# EAGLE board FiberLED (EAGLE 9.0.1)
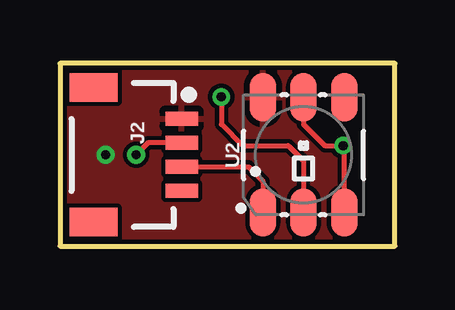
[diagram p0: board, top side]
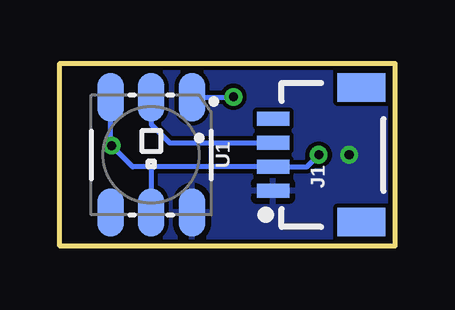
[diagram p1: board, bottom side, seen from below]

Size 13.97 x 7.62 mm. Coordinates in mm from the lower left corner, seen from the top.
Outline: 0,0 13.97,0 13.97,7.62 0,7.62 0,0
Copper layers (1*16): Top 0.035mm / dielectric 1.5mm / Bottom 0.035mm
Design rules "SparkFun-2-layer-TIGHT": minimum track width 7mil, minimum drill 15mil, track to track 7mil, track to pad 7mil, pad to pad 7mil, via to via 7mil, smd to smd 7mil, copper to edge 7mil, drill to drill 7mil, minimum pad ring 7mil, minimum via ring 7mil, stop-mask expansion 4mil, vias tented up to drill 25mil, thermal gap 10mil

## Footprints (pad centres in the part's own frame; a part is rotated, then mirrored left to right if it is on the bottom)
1X04_1MM_RA = smd 0.6 x 1.35: 1 -1.5,0; 2 -0.5,0; 3 0.5,0; 4 1.5,0 | smd 1.2 x 2: NC1 2.8,-3.675; NC2 -2.8,-3.675
LED-TRICOLOR-5050-IC = smd 2 x 1.1: 1 -2.4,1.7; 2 -2.4,0; 3 -2.4,-1.7; 4 2.4,-1.7; 5 2.4,0; 6 2.4,1.7

## Placement (x,y rotation side)
FRAME1  FRAME-LETTER  [CREATIVE_COMMONS]  -80.01,1.27 0 top  (outside the outline)
J1  [1X04_1MM_RA]  5.08,3.81 90 bottom
J2  [1X04_1MM_RA]  5.08,3.81 270 top
U1  WS2812  [LED-TRICOLOR-5050-IC]  10.16,3.81 270 bottom
U2  WS2812  [LED-TRICOLOR-5050-IC]  10.16,3.81 90 top

## Library data of the parts
FRAME1 = SparkFun-Aesthetics
J1 J2 = SparkFun-Connectors; PROD_ID: CONN-13694
U1 U2 = SparkFun-LED; PROD_ID: DIO-11598

## Nets
5V: J1.2 J2.2 U1.3 U1.5 U2.3 U2.5
GND: J1.1 J2.1 U1.6 U2.6
N$1: J1.3 U1.2
N$3: J2.3 U2.1
N$5: U1.1 U2.2

## Tracks (layer width: path | path; a pad name or v marks a point on that pad's centre or on a via)
5V  (via drill 0.38)
  Top 0.203: J2.2 3.67,4.31 v3.17,3.81 | U2.3 11.86,4.14 v11.81,4.19 11.05,4.19 10.16,5.08 U2.5
  Bottom 0.203: v3.17,3.81 3.67,3.31 J1.2 10.16,3.31 | U1.3 11.86,4.24 v11.81,4.19 10.93,3.31 10.16,3.31 | 10.16,3.31 U1.5
GND  (via drill 0.38)
  other vias: 1.91,3.81
  pour Bottom: 13.97,0 0,0 0,7.62 13.97,7.62
  pour Top: 0,0 13.97,0 13.97,7.62 0,7.62
N$1
  Bottom 0.203: U1.2 10.16,5.08 9.39,4.31 J1.3
N$3
  Top 0.203: J2.3 7.87,3.31 8.13,3.05 | U2.1 8.46,2.72 8.13,3.05 | 8.13,3.05
N$5  (via drill 0.38)
  Top 0.203: v6.73,6.22 6.73,5.08 7.62,4.19 9.53,4.19 10.16,3.56 U2.2
  Bottom 0.203: U1.1 6.74,6.21 v6.73,6.22